# EAGLE board mux (EAGLE 6.3)
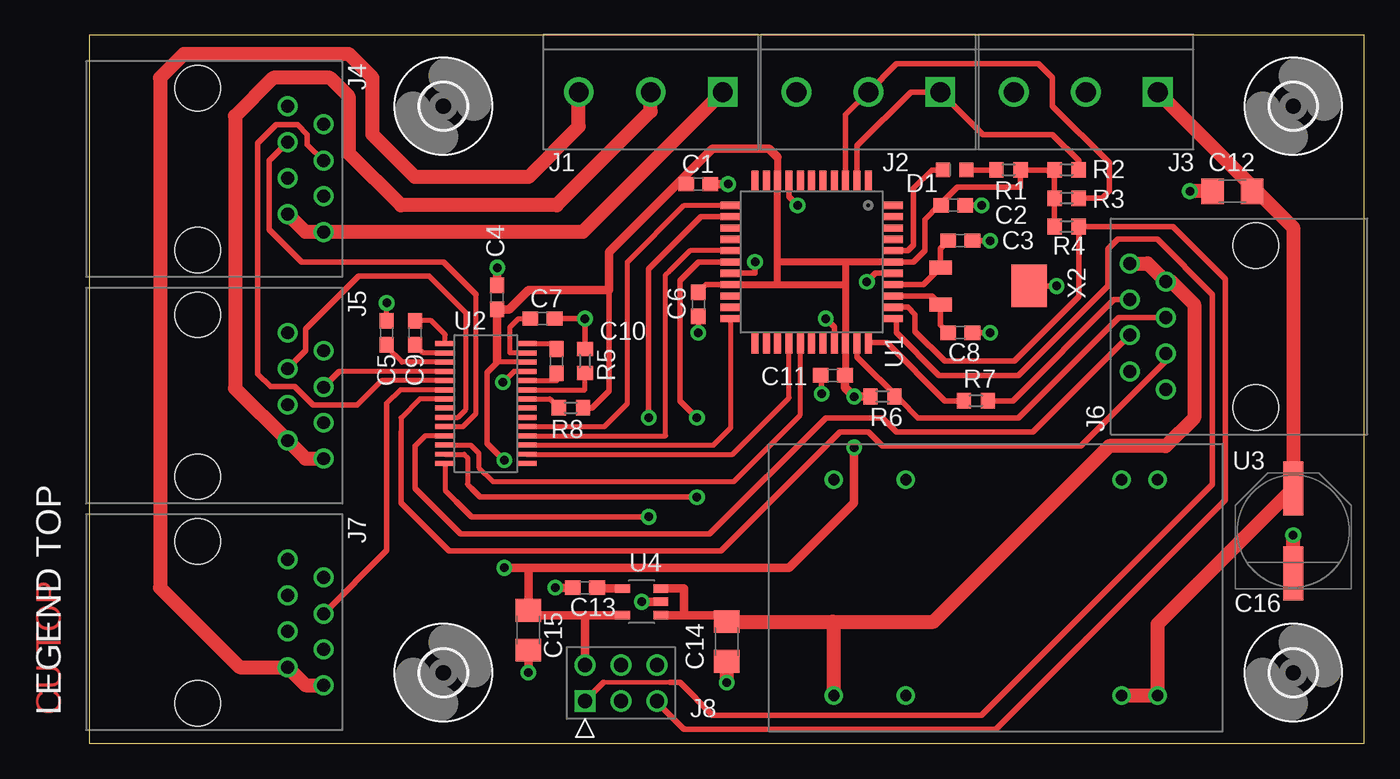
[diagram p0: board, top side]
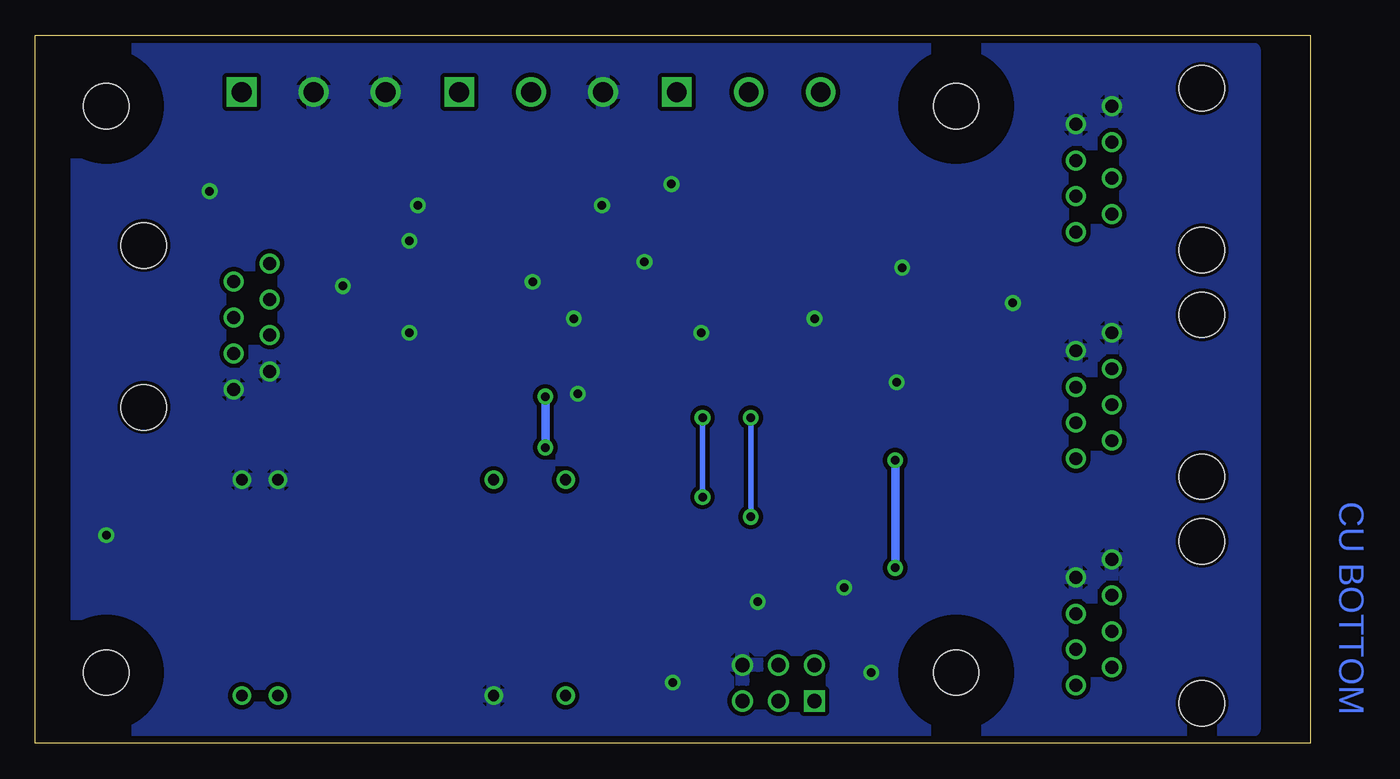
[diagram p1: board, bottom side, seen from below]

Size 90 x 50 mm. Coordinates in mm from the lower left corner, seen from the top.
Outline: 0,0 90,0 90,50 0,50 0,0
Copper layers (1*16): Top 0.035mm / dielectric 1.5mm / Bottom 0.035mm
Design rules "pcbtrain *": minimum track width 0.2mm, minimum drill 0.4mm, track to track 0.3mm, track to pad 0.3mm, pad to pad 0.3mm, via to via 0.3mm, smd to smd 0mil, copper to edge 10mil, drill to drill 0.2mm, minimum pad ring 10mil, minimum via ring 10mil, stop-mask expansion 0.125mm, vias tented up to drill 0mil, thermal gap 10mil

## Footprints (pad centres in the part's own frame; a part is rotated, then mirrored left to right if it is on the bottom)
C0603 = smd 1.1 x 1: 1 -0.85,0; 2 0.85,0
C1206 = smd 1.6 x 1.8: 1 -1.4,0; 2 1.4,0
PANASONIC_E = smd 3.8 x 1.4: + 3,0; - -3,0
LED_0603 = smd 1 x 1: 1 -0.825,0; 2 0.825,0
3,2 = hole 3.2: 0,0
MKDSN_1.5_3_5.08 = drill 1.4 square: 1 -5.08,0 | drill 1.4: 2 0,0; 3 5.08,0
RJ45 = drill 0.9: 1 0,0; 2 1.27,2.54; 3 2.54,0; 4 3.84,2.54; 5 5.08,0; 6 6.35,2.54; 7 7.62,0; 8 8.89,2.54 | hole 3.2: -1.27,-6.35; 10.16,-6.35
HEADER-3X2-0.1 = drill 1 square: 1 0,0 | drill 1: 2 2.54,0; 3 0,-2.54; 4 2.54,-2.54; 5 0,-5.08; 6 2.54,-5.08
R0603 = smd 1 x 1.1: 1 -0.85,0; 2 0.85,0
TQFP44 = smd 1.5 x 0.5: 1 -5.7,4; 2 -5.7,3.2; 3 -5.7,2.4; 4 -5.7,1.6; 5 -5.7,0.8; 6 -5.7,0; 7 -5.7,-0.8; 8 -5.7,-1.6; 9 -5.7,-2.4; 10 -5.7,-3.2; 11 -5.7,-4; 23 5.7,-4; 24 5.7,-3.2; 25 5.7,-2.4; 26 5.7,-1.6; 27 5.7,-0.8; 28 5.7,0; 29 5.7,0.8; 30 5.7,1.6; 31 5.7,2.4; 32 5.7,3.2; 33 5.7,4 | smd 0.5 x 1.5: 12 -4,-5.7; 13 -3.2,-5.7; 14 -2.4,-5.7; 15 -1.6,-5.7; 16 -0.8,-5.7; 17 0,-5.7; 18 0.8,-5.7; 19 1.6,-5.7; 20 2.4,-5.7; 21 3.2,-5.7; 22 4,-5.7; 34 4,5.7; 35 3.2,5.7; 36 2.4,5.7; 37 1.6,5.7; 38 0.8,5.7; 39 0,5.7; 40 -0.8,5.7; 41 -1.6,5.7; 42 -2.4,5.7; 43 -3.2,5.7; 44 -4,5.7
TSSOP28 = smd 1.4 x 0.35: 1 -2.875,4.225; 2 -2.875,3.575; 3 -2.875,2.925; 4 -2.875,2.275; 5 -2.875,1.625; 6 -2.875,0.975; 7 -2.875,0.325; 8 -2.875,-0.325; 9 -2.875,-0.975; 10 -2.875,-1.625; 11 -2.875,-2.275; 12 -2.875,-2.925; 13 -2.875,-3.575; 14 -2.875,-4.225; 15 2.875,-4.225; 16 2.875,-3.575; 17 2.875,-2.925; 18 2.875,-2.275; 19 2.875,-1.625; 20 2.875,-0.975; 21 2.875,-0.325; 22 2.875,0.325; 23 2.875,0.975; 24 2.875,1.625; 25 2.875,2.275; 26 2.875,2.925; 27 2.875,3.575; 28 2.875,4.225
TEL5 = drill 0.8: 2 -11.43,-7.62; 3 -8.89,-7.62; 9 6.35,-7.62; 11 11.43,-7.62; 14 11.43,7.62; 16 6.35,7.62; 22 -8.89,7.62; 23 -11.43,7.62
SOT23-5 = smd 1.05 x 0.6: 1 -1.35,0.95; 2 -1.35,0; 3 -1.35,-0.95; 4 1.35,-0.95; 5 1.35,0.95
MS1V-T1K = smd 1 x 1.6: 1 -1.3,-2.9; 2 1.3,-2.9 | smd 3 x 2.5: 3 0,3.35

## Placement (x,y rotation side)
C1  220n  [C0603]  43,39.5 0 top
C2  220n  [C0603]  61,38 0 top
C3  10p  [C0603]  61.5,35.5 0 top
C4  220n  [C0603]  28.8,31.5 90 top
C5  220n  [C0603]  21,29 90 top
C6  220n  [C0603]  43,31 270 top
C7  220n  [C0603]  32,30 0 top
C8  10p  [C0603]  61.5,29 0 top
C9  220n  [C0603]  23,29 90 top
C10  220n  [C0603]  33,27 90 top
C11  220n  [C0603]  52.5,26 180 top
C12  4u7  [C1206]  80.7,39 180 top
C13  10n  [C0603]  35,11 180 top
C14  4u7  [C1206]  45,7.2 270 top
C15  4u7  [C1206]  31,8 270 top
C16  100u  [PANASONIC_E]  85,15 90 top
D1  SML-D12U8W  [LED_0603]  61.1,40.5 0 top
H1  MOUNT-HOLE3.2  [3,2]  25,45 0 top
H2  MOUNT-HOLE3.2  [3,2]  85,45 0 top
H3  MOUNT-HOLE3.2  [3,2]  25,5 0 top
H4  MOUNT-HOLE3.2  [3,2]  85,5 0 top
J1  MKDSN1.5/3-5.08  [MKDSN_1.5_3_5.08]  39.64,46 180 top
J2  MKDSN1.5/3-5.08  [MKDSN_1.5_3_5.08]  55,46 180 top
J3  MKDSN1.5/3-5.08  [MKDSN_1.5_3_5.08]  70.36,46 180 top
J4  MOLEX95501-2881  [RJ45]  14,45 270 top
J5  MOLEX95501-2881  [RJ45]  14,29 270 top
J6  MOLEX95501-2881  [RJ45]  76,25 90 top
J7  MOLEX95501-2881  [RJ45]  14,13 270 top
J8  HEADER_3x2  [HEADER-3X2-0.1]  35,3 90 top
R1  330R  [R0603]  64.9,40.5 0 top
R2  4k7  [R0603]  69,40.5 0 top
R3  4k7  [R0603]  69,38.5 0 top
R4  10k  [R0603]  69,36.5 0 top
R5  10k  [R0603]  35,27 270 top
R6  4k7  [R0603]  56,24.5 0 top
R7  22R  [R0603]  62.6,24.2 0 top
R8  10k  [R0603]  34,23.7 180 top
U1  ATxmega32A4  [TQFP44]  51,34 270 top
U2  MAX3241ECUI+  [TSSOP28]  28,24 0 top
U3  TEL5-1211  [TEL5]  64,11 180 top
U4  LP2985-33  [SOT23-5]  39,10 180 top
X2  MS1V-T1K  [MS1V-T1K]  63,32.3 270 top

## Library data of the parts
C1-C15 R1-R8 = resistor
C16 D1 J1-J8 U1-U4 X2 = ahs
H1-H4 = holes

## Nets
12V: C12.1 C16.+ J3.1 U3.22 U3.23
12V1: J1.2 J5.7 J5.8
12V2: J1.1 J4.7 J4.8
12V3: J1.3 J7.7 J7.8
+3V3: C1.1 C2.1 C4.1 C6.1 C11.1 C15.1 J8.2 R1.2 R2.1 R3.1 R4.1 R6.1 R8.1 U1.9 U1.19 U1.31 U1.39 U2.26 U4.5
+5V: C14.1 J6.7 J6.8 U3.14 U4.1 U4.3
GND: C1.2 C2.2 C3.2 C4.2 C5.2 C6.2 C7.2 C8.2 C11.2 C12.2 C13.2 C14.2 C15.2 C16.- J2.3 J3.2 J3.3 J4.1 J4.2 J5.1 J5.2 J6.1 J6.2 J7.1 J7.2 J8.6 R5.1 U1.8 U1.18 U1.30 U1.38 U2.25 U3.2 U3.3 U3.16 U4.2 X2.3
MODE1: J2.1 R2.2 U1.2
MODE2: J2.2 R3.2 U1.3
N$1: C7.1 U2.27
N$2: C5.1 U2.3
N$3: C13.1 U4.4
N$4: C3.1 U1.37 X2.1
N$5: C8.1 U1.36 X2.2
N$6: C10.2 U2.28
N$7: C10.1 U2.24
N$8: C9.2 U2.1
N$9: C9.1 U2.2
N$10: R8.2 U2.22
N$11: J8.1 U1.34
N$12: J8.5 R4.2 U1.35
N$13: R5.2 U2.23
N$14: R7.1 U1.33
N$16: D1.2 R1.1
N$17: D1.1 U1.40
RX1: U1.12 U2.19
RX2: U1.16 U2.18
RX3: U1.22 U2.17
RXD: U1.26 U2.16
RXIN1: J5.4 U2.4
RXIN2: J4.4 U2.5
RXIN3: J7.4 U2.6
RXIND: J6.3 U2.7
RXIND_TTL: J6.5 R6.2 U1.32
TX1: U1.13 U2.14
TX2: U1.17 U2.13
TXD: U1.27 U2.12
TXOUT1: J5.3 U2.9
TXOUT2: J4.3 U2.10
TXOUTD: J6.4 U2.11
TXOUTD_TTL: J6.6 R7.2

## Tracks (layer width: path | path; a pad name or v marks a point on that pad's centre or on a via)
12V
  Top 1: U3.22 U3.23 75.43,8.43 C16.+ 85,36.44 82.22,39.22 | J3.1 82.22,39.22 | C12.1 82.1,39.1 82.22,39.22
12V1
  Top 1: J5.8 15.27,20.11 J5.7 10.3,25.08 10.3,44.3 13,47 17,47 18.3,45.7 18.3,41.7 22,38 33,38 39.64,44.64 J1.2
12V2
  Top 1: J4.7 15.27,36.11 J4.8 34.83,36.11 J1.1
12V3
  Top 1: J7.8 15.27,4.11 J7.7 10.62,5.38 5,11 5,47 6.7,48.7 18.3,48.7 20,47 20,43 23,40 31,40 34.56,43.56 J1.3
+3V3  (via drill 0.6)
  Top 0.35: U2.26 28.88,26.93 28.8,27
  Top 0.4: U1.19 43.55,32.4 C6.1 | 53.4,26.05 C11.1 | R8.1 35.5,23.7 36.7,24.9 36.7,32 | U1.39 58.2,34 59,34.8 59,37 60,38 C2.1 60.15,38.15 61.3,39.3 65.75,39.3 R1.2 | 65.7,40.45 R1.2 | R4.1 R3.1 68.15,40 | 68.15,40 R2.1 | R1.2 67.65,40.5 68.15,40 | v29.3,20 28.1,21.2 28.1,26.2 28.8,26.9 28.8,27
  Top 0.5: U1.19 48.6,32.4 | 48.6,32.4 48.6,34 | 48.6,34 U1.9 48.6,41.4 | 48.6,32.4 53.4,32.4 | 53.4,32.4 U1.31 53.4,26.05 | U1.39 53.4,34 | 53.4,34 53.4,32.4 | 53.4,34 48.6,34
  Top 0.6: U4.5 35,9.05 | 35,9.05 J8.2 | 35,9.05 31.35,9.05 C15.1 31,12.4 | 31,12.4 49.4,12.4 54,17 v54,20.9 | 31,12.4 v29.3,12.4 | 41.5,39.5 C1.1 | 41.5,39.5 44,42 47,42 48,42 48.6,41.4 | 41.5,39.5 36.7,34.7 36.7,32 31,32 29.65,30.65 C4.1 28.8,29.4 28.8,27 | R6.1 v54,24.5 53.35,25.15 C11.1
  Bottom 0.6: v29.3,20 v29.3,12.4 | v54,20.9 v54,24.5
+5V
  Top 0.6: U4.3 42,10.95 42,9.05 | U4.1 42,9.05 | 42,9.05 45.55,9.05 C14.1
  Top 1: J6.8 74.73,33.89 J6.7 76.38,32.62 78,31 78,23 76,21 72,21 59.6,8.6 52.5,8.6 | C14.1 52.5,8.6 | U3.14 52.57,8.53 52.5,8.6
GND  (via drill 0.6)
  Top 0.35: U2.25 29.98,26.27 v29.2,25.5 | C5.2 v21,31.1
  Top 0.4: C6.2 v43,29 | C2.2 v63,38 | U1.8 49.4,38.6 v50,38 | U1.18 47,33.2 v47,34 | U1.30 52.6,29.4 v52,30 | U1.38 55.5,33.2 v54.9,32.6 | C7.2 v35,30 R5.1 | C11.2 51.7,25.95 v51.7,24.7 | X2.3 v68.3,32.3 | C3.2 v63.6,35.5 | C8.2 v63.6,29
  Top 0.6: U4.2 v39,10 | C15.2 v31,5 | C13.2 v32.9,11 | C1.2 v45.1,39.5 | C4.2 v28.8,33.6
  Top 1: C14.2 v45,4.3 | C12.2 v77.7,39 | C16.- v85,14.7
  pour Bottom: 4,1 87,1 87,49 4,49
MODE1
  Top 0.4: U1.2 54.2,42.2 58,46 J2.1 63.08,43 68,43 69.85,41.15 R2.2
MODE2
  Top 0.4: U1.3 53.4,44.4 J2.2 57,48 67,48 68,47 68,45 72,41 72,39 71.5,38.5 R3.2
N$1
  Top 0.35: U2.27 29.7,27.57 29.7,29.4 30.3,30 C7.1 31,30
N$2
  Top 0.35: U2.3 22.07,26.93 21,28 C5.1
N$3
  Top 0.6: U4.4 35.9,10.95 C13.1
N$4
  Top 0.4: U1.37 58.9,32.4 X2.1 60.1,34.95 C3.1
N$5
  Top 0.4: U1.36 59.5,31.6 X2.2 60.1,29.55 C8.1
N$6
  Top 0.35: U2.28 32.62,28.23 C10.2
N$7
  Top 0.35: U2.24 33,25.62 C10.1
N$8
  Top 0.35: U2.1 25.12,28.88 24.15,29.85 C9.2
N$9
  Top 0.35: U2.2 23.57,27.57 C9.1
N$10
  Top 0.35: U2.22 32.52,24.32 R8.2
N$11
  Top 0.3: 36.3,4.3 41,4.3
  Top 0.4: U1.34 57,30 57,29 60,26 65.6,26 71.9,32.3 71.9,34.9 72.6,35.6 75.4,35.6 79.3,31.7 79.3,18.3 63,2 44,2 41.7,4.3 41,4.3 | 36.3,4.3 J8.1
N$12
  Top 0.4: J8.5 40.08,2.92 42,1 42.04,1.04 42.08,1 64,1 80.2,17.2 80.2,32.8 76.5,36.5 R4.2 69.85,31.55 65.3,27 60.4,27 58.3,29.1 58.3,30.3 57.8,30.8 U1.35
N$13
  Top 0.35: U2.23 35,24.98 R5.2
N$14
  Top 0.4: U1.33 56.3,28.3 60.4,24.2 R7.1
N$16
  Top 0.4: D1.2 R1.1
N$17
  Top 0.4: U1.40 57.8,34.8 58.2,35.2 58.2,39.2 59.5,40.5 D1.1
RX1
  Top 0.35: U2.19 36.38,22.38 38,24 38,25.2 38,34 42,38 U1.12
RX2
  Top 0.35: U2.18 40.7,21.73 40.7,33.1 41,33.4 42.4,34.8 U1.16
RX3
  Top 0.35: U2.17 44.08,21.07 45.3,22.3 45.3,25.3 U1.22
RXD
  Top 0.35: U2.16 45.42,20.43 49.4,24.4 U1.26
RXIN1
  Top 0.35: U2.4 17.66,26.27
  Top 0.4: 17.66,26.27 J5.4
RXIN2
  Top 0.35: U2.5 20.62,25.62 18.9,23.9
  Top 0.4: 18.9,23.9 15.8,23.9 14.5,25.2 12.8,25.2 11.9,26.1 11.9,42.4 13.2,43.7 14.7,43.7 15.4,43 15.4,42.3 J4.4
RXIN3
  Top 0.35: U2.6 21.98,24.98 21,24
  Top 0.4: 21,24 21,13.62 J7.4
RXIND
  Top 0.35: U2.7 23.32,24.32 22,23 22,22
  Top 0.4: J6.3 76,27 70,21 56,21 55,22 53,22 44.6,13.6 25.4,13.6 22,17 22,22
RXIND_TTL
  Top 0.4: J6.5 72.68,30.08 65.6,23 58.5,23 57.25,24.25 | U1.32 54.2,27.3 57.25,24.25 | R6.2 56.9,24.25 57.25,24.25
TX1  (via drill 0.6)
  Top 0.35: U2.14 25.12,17.88 25.9,17.1
  Top 0.4: U1.13 43.2,37.2 39.5,33.5 v39.5,23 | 25.9,17.1 27,16 v39.5,16
  Bottom 0.4: v39.5,16 v39.5,23
TX2  (via drill 0.6)
  Top 0.35: U2.13 26.48,20.43 26.7,20.2 26.7,18.3 27,18
  Top 0.4: U1.17 43,34 41.7,32.7 41.7,24.2 v42.9,23 | 27,18 27.6,17.4 v42.9,17.4
  Bottom 0.4: v42.9,23 v42.9,17.4
TXD
  Top 0.35: U1.27 50.2,23.2 45.5,18.5 28.5,18.5 27.5,19.5 27.5,20.5 26.93,21.07 U2.12
TXOUT1
  Top 0.35: U2.9 26.02,23.02 26.6,23.6 26.6,30.4 24,33
  Top 0.4: J5.3 15.27,27.73 15.27,29.27 19,33 24,33
TXOUT2
  Top 0.35: U2.10 26.38,22.38 27.3,23.3 27.3,31.7
  Top 0.4: J4.3 12.7,41.16 12.7,36.3 15,34 24,34 25,34 27.3,31.7
TXOUTD
  Top 0.35: U2.11 23.73,21.73 23,21
  Top 0.4: 23,21 23,18 26.2,14.8 43.8,14.8 52,23 56,23 57,22 66.62,22 J6.4
TXOUTD_TTL
  Top 0.4: J6.6 72.35,31.35 65.2,24.2 R7.2

## Text on the board
Top: CU TOP
Bottom: CU BOTTOM
tNames: LEGEND TOP
tStop: RESIST TOP
bStop: RESIST BOTTOM